# EAGLE board ESP32Cam-Programmer-Public (EAGLE 9.6.1)
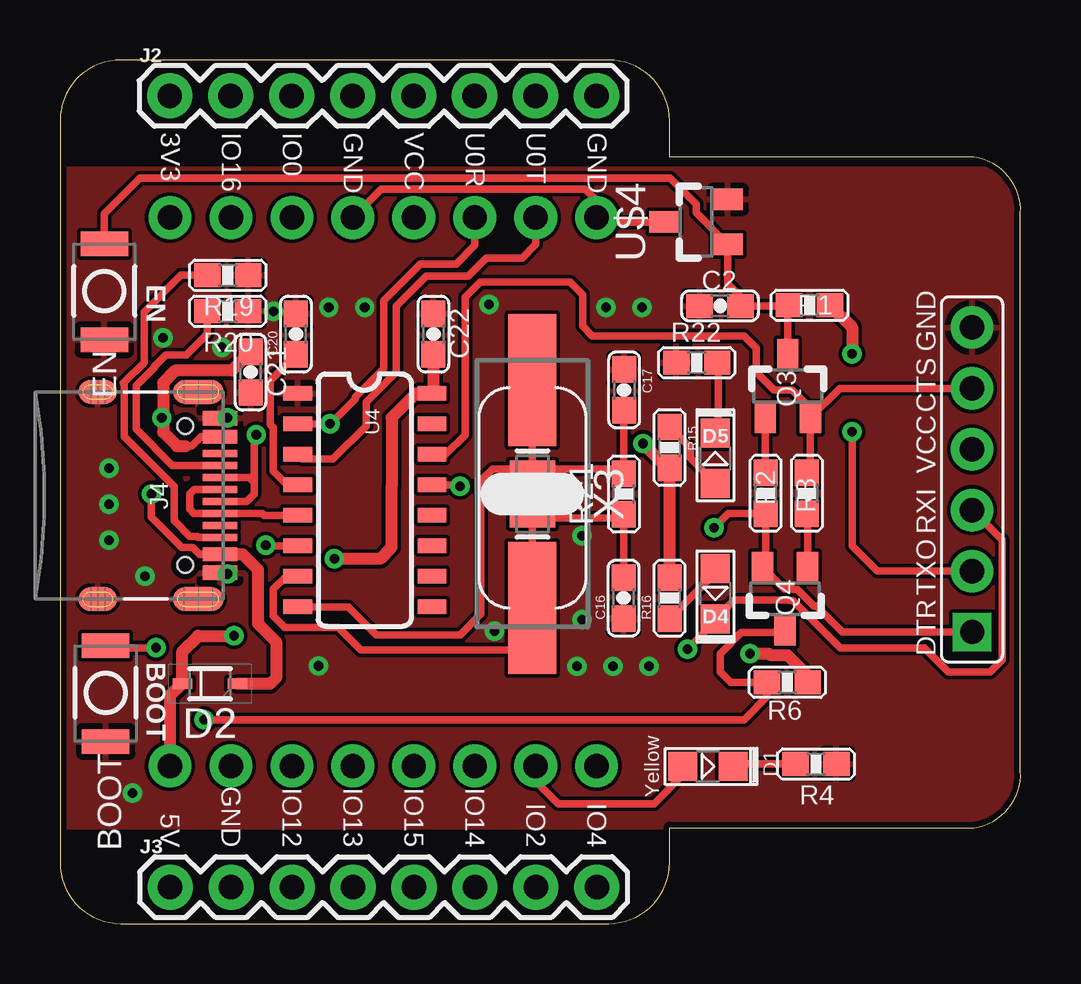
[diagram p0: board, top side]
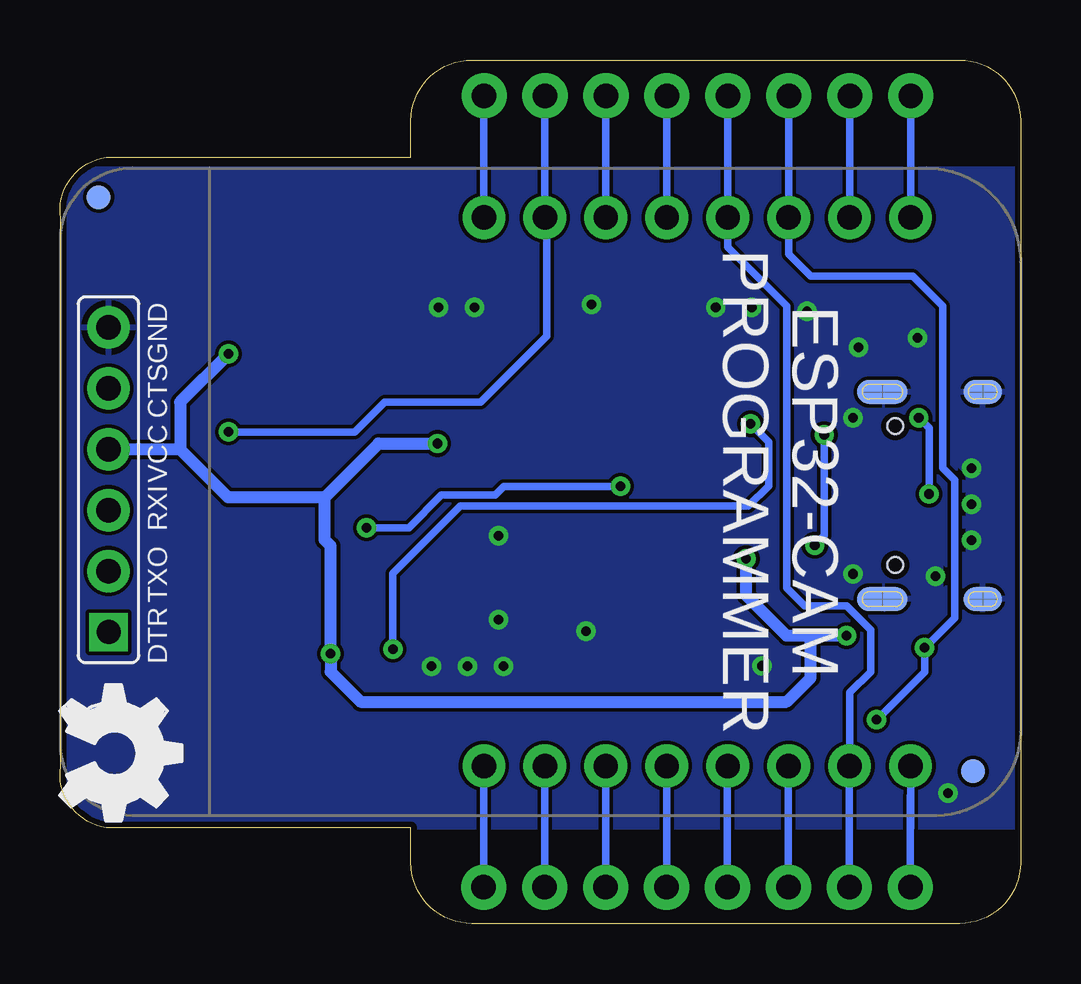
[diagram p1: board, bottom side, seen from below]

Size 40.02 x 36 mm. Coordinates in mm from the lower left corner, seen from the top.
Outline: 25.4,31.94 25.4,33.46 arc90 22.86,36 2.54,36 arc90 0,33.46 0,2.54 arc90 2.54,0 22.86,0 arc90 25.4,2.54 25.4,4 38.1,4 arc90 40,6.54 40,29.4 arc90 38.1,31.94 25.4,31.94
Copper layers (1*16): Top 0.035mm / dielectric 1.5mm / Bottom 0.035mm
Design rules "Gerai_Cerdas_DRU_v2_0_4mil": minimum track width 6mil, minimum drill 0.4mm, track to track 6mil, track to pad 6mil, pad to pad 6mil, via to via 6mil, smd to smd 0mil, copper to edge 10mil, drill to drill 10mil, minimum pad ring 12mil, minimum via ring 8mil, stop-mask expansion 2mil, vias tented up to drill 25mil, thermal gap 10mil

## Footprints (pad centres in the part's own frame; a part is rotated, then mirrored left to right if it is on the bottom)
157SW = smd 1.016 x 1.981: 1 0,0; 2 4,0
C0603 = smd 1.1 x 1: 1 -0.85,0; 2 0.85,0
LED0805 = smd 1.2 x 1.2: A 0,-1.05; C 0,1.05
SOD-323 = smd 0.82 x 0.42: A -1.15,0; C 1.15,0
CON-FTDI = drill 1.016 pad 1.778: CTS 3.81,0; GND 6.35,0; RXI -1.27,0; TX0 -3.81,0; VCC 1.27,0 | drill 1 square: DTR -6.35,0
1X08 = drill 1.016 pad 1.88: 1 0,0; 2 2.54,0; 3 5.08,0; 4 7.62,0; 5 10.16,0; 6 12.7,0; 7 15.24,0; 8 17.78,0
USB-C-16P = smd 0.3 x 1.45: A5 -1.25,0; A6 -0.25,0; A7 0.25,0; A8 1.25,0; B5 1.75,0; B6 0.75,0; B7 -0.75,0; B8 -1.75,0 | smd 0.6 x 1.45: GND -3.225,0; GND2 3.225,0 | smd 1 x 2.1: SHLD1 -4.32,-0.915; SHLD2 4.32,-0.915 | smd 1 x 2.1 bottom: SHLD3 -4.32,-0.915; SHLD4 4.32,-0.915 | smd 1 x 1.6: SHLD5 -4.32,-5.095; SHLD8 4.32,-5.095 | smd 1 x 1.6 bottom: SHLD6 -4.32,-5.095; SHLD7 4.32,-5.095 | smd 0.55 x 1.45: VBUS1 -2.45,0; VBUS2 2.45,0 | hole 0.65: -2.89,-1.445; 2.89,-1.445
FIDUCIAL-1X2 = smd 1 x 1: 1 0,0
SOT-23 = smd 0.889 x 1.27: 1 -0.94,-1.321; 2 0.94,-1.321; 3 0,1.321
R0603 = smd 1.1 x 1: 1 -0.85,0; 2 0.85,0
SO016 = smd 0.6 x 1.2: 1 -4.445,-2.8; 2 -3.175,-2.8; 3 -1.905,-2.8; 4 -0.635,-2.8; 5 0.635,-2.8; 6 1.905,-2.8; 7 3.175,-2.8; 8 4.445,-2.8; 9 4.445,2.8; 10 3.175,2.8; 11 1.905,2.8; 12 0.635,2.8; 13 -0.635,2.8; 14 -1.905,2.8; 15 -3.175,2.8; 16 -4.445,2.8
ESP32CAM = drill 1.016 pad 1.778: 3V3 11.43,-15.42; 5V -11.43,-15.42; GND 11.43,-7.8; GND1 11.43,2.36; GND2 -11.43,-12.88; IO0 11.43,-10.34; IO2 -11.43,-0.18; IO4 -11.43,2.36; IO12 -11.43,-10.34; IO13 -11.43,-7.8; IO14 -11.43,-2.72; IO15 -11.43,-5.26; IO16 11.43,-12.88; U0R 11.43,-2.72; U0T 11.43,-0.18; VCC 11.43,-5.26
SMD-CRYSTAL = smd 5.5 x 2: 1 -4.75,0; 2 4.75,0
CSTCE* = smd 0.7 x 1.905: 1 -1.041,0; 2 0,0; 3 1.041,0

## Placement (x,y rotation side)
BOOT  BUTTON  [157SW]  1.9,7.59 90 top
C2  10uF  [C0603]  27.5,25.75 0 top
C16  10pF  [C0603]  23.48,13.56 90 top
C17  10pF  [C0603]  23.51,22.25 270 top
C20  10nF  [C0603]  9.83,24.57 90 top
C21  100nF  [C0603]  7.94,22.99 270 top
C22  100nF  [C0603]  15.56,24.57 270 top
D1  Yellow  [LED0805]  27,6.55 270 top
D2  1N5819HW (SL)  [SOD-323]  6.25,10 180 top
D4  GREEN  [LED0805]  27.3,13.75 180 top
D5  Yellow  [LED0805]  27.3,19.4 0 top
EN  BUTTON  [157SW]  1.85,24.34 90 top
J1  CON-FTDI-DIP  [CON-FTDI]  38,18.5 90 top
J2  [1X08]  4.57,34.5 0 top
J3  [1X08]  4.59,1.52 0 top
J4  [USB-C-16P]  6.67,17.84 270 top
JP8  FIDUCIAL1X2  [FIDUCIAL-1X2]  38.42,30.28 180 bottom
JP9  FIDUCIAL1X2  [FIDUCIAL-1X2]  1.97,6.35 180 bottom
Q3  S8050  [SOT-23]  30.33,22.41 0 top
Q4  S8050  [SOT-23]  30.21,13.54 180 top
R1  10K  [R0603]  31.23,25.78 0 top
R2  10K  [R0603]  29.4,17.94 90 top
R3  10K  [R0603]  31.12,17.94 270 top
R4  1K  [R0603]  31.5,6.65 180 top
R6  10K  [R0603]  30.31,10.06 0 top
R15  330  [R0603]  25.4,19.85 270 top
R16  330  [R0603]  25.4,13.56 90 top
R19  5.1k  [R0603]  6.99,27.03 180 top
R20  5.1k  [R0603]  6.99,25.53 180 top
R21  [R0603]  23.5,17.91 90 top
R22  1K  [R0603]  26.54,23.38 0 top
U4  CH340G  [SO016]  12.7,17.65 270 top
U$1  ESP32CAM-FOOTPRINT  [ESP32CAM]  20,18 90 bottom
U$2  [OSHW_FILLX200_NOTEXT]  40.03,9.94 270 bottom
U$4  AO3400  [SOT-23]  26.5,29.25 90 top
U$13  FRAME  [A4-HOR]  -3.59,1.79 0 top  (outside the outline)
X3  [SMD-CRYSTAL]  19.68,17.91 270 top
X4  RESONATORSMD-CSTCEXX  [CSTCE*]  19.68,17.91 270 top

## Library data of the parts
BOOT EN = MySMD
C2 C16 C17 C20-C22 D1 D4 D5 J1 R1-R4 R6 R15 R16 R19-R22 U$1 U$4 U$13 X3 X4 = geraicerdas
D2 = geraicerdas; DATASHEET: https://datasheet.lcsc.com/szlcsc/1810232207_ON-Semiconductor-1N4148WS_C118873.pdf; MANUFACTURER_PART_NUMBER: 1N4148WS
J2 J3 = SparkFun-Connectors; PROD_ID: CONN-08438
J4 = SparkFun-Connectors; PROD_ID: CONN-14122
JP8 JP9 = SparkFun
Q3 Q4 = geraicerdas; DATASHEET: https://datasheet.lcsc.com/szlcsc/1809211225_Guangdong-Hottech-S8050_C181158.pdf; LCSC: C181158; MPN: S8050
U4 = SparkFun-DigitalIC; PROD_ID: IC-13498
U$2 = Logo

## Nets
CC3: J4.A5 R20.2
CC4: J4.B5 R19.2
D+2: J4.A6 J4.B6 U4.5
D-2: J4.A7 J4.B7 U4.6
DTR: J1.DTR Q4.2 R2.1 U4.13
EN: C2.2 EN.2 Q3.3 R1.1 U$4.1
GND: BOOT.1 C2.1 C16.1 C17.1 C20.2 C21.2 C22.1 EN.1 J1.GND J4.GND J4.GND2 R4.1 R19.1 R20.1 R22.1 U4.1 U$4.2 X4.2
IO0: BOOT.2 J2.3 Q4.3 R6.1 U$1.IO0
IO2: D1.A J3.7 U$1.IO2
IO4: J3.8 U$1.IO4
IO12: J3.3 U$1.IO12
IO13: J3.4 U$1.IO13
IO14: J3.6 U$1.IO14
IO15: J3.5 U$1.IO15
IO16: J2.2 U$1.IO16
N$2: D1.C R4.2
N$9: Q3.1 R2.2
N$10: Q4.1 R3.2
N$14: D4.A R16.1
N$15: D5.A R15.1
N$16: C17.2 R21.2 U4.8 X3.1 X4.1
N$17: C16.2 R21.1 U4.7 X3.2 X4.3
N$18: D5.C R22.2
NC_3V3: J2.1 U$1.3V3
NC_VCC: J2.5 U$1.VCC
RTS: J1.CTS Q3.2 R3.1 U4.14
SHLD: J4.SHLD1 J4.SHLD2 J4.SHLD3 J4.SHLD4 J4.SHLD5 J4.SHLD6 J4.SHLD7 J4.SHLD8
U0RX: D4.C J1.RXI J2.6 U4.2 U$1.U0R
U0TX: J1.TX0 J2.7 U4.3 U$1.U0T
USBVCC: C21.1 D2.A J4.VBUS1 J4.VBUS2
V1: C20.1 U4.4
VCC: C22.2 D2.C J1.VCC J3.1 R1.2 R6.2 R15.2 R16.2 U4.16 U$1.5V
VSS: J2.4 J2.8 J3.2 U$1.GND U$1.GND1 U$1.GND2 U$4.3

## Tracks (layer width: path | path; a pad name or v marks a point on that pad's centre or on a via)
CC3
  Top 0.305: R20.2 6.13,24.57 5.27,23.71 4.41,23.71 3.96,23.25 3.96,23.2 3.17,22.42 3.17,20.61 4.69,19.09 J4.A5
CC4
  Top 0.305: J4.B5 5.76,16.09 5.71,16.14 5.42,16.14 4.76,16.8 4.76,18.22 2.68,20.31 2.68,22.5 2.64,22.53 3.5,23.39 3.5,25.5 5.03,27.03 R19.2
D+2
  Top 0.305: U4.5 8.51,17.02 8.43,17.09 J4.B6 5.58,17.09 5.4,17.27 5.4,17.91 5.58,18.09 J4.A6
D-2  (via drill 0.4)
  Top 0.305: J4.B7 7.89,18.59 8.1,18.38 | 8.1,18.38 8.1,17.91 7.78,17.59 J4.A7 | 8.1,18.38 8.1,20.45 v8.18,20.38 | v8.57,15.78 8.6,15.75 U4.6
  Bottom 0.305: v8.18,20.38 8.18,16.17 v8.57,15.78
DTR  (via drill 0.4)
  Top 0.305: U4.13 16.61,18.29 v16.67,18.22 | v27.25,16.5 27.84,17.09 R2.1 29.4,15 Q4.2 30.18,13.96 30.55,13.96 30.58,13.92 30.72,13.92 31.4,13.25 31.5,13.25 32.6,12.15 J1.DTR
  Bottom 0.305: v16.67,18.22 21.53,18.22 21.89,17.86 24.14,17.86 25.5,16.5 v27.25,16.5
EN
  Top 0.152: C2.2 28.5,25.75
  Top 0.305: Q3.3 30.33,25.72 R1.1 30.36,25.75 28.5,25.75 28.5,26 27.82,26.68 U$4.1 26.5,29.63 26.5,30 25.42,31.08 3.33,31.08 1.85,29.6 EN.2
GND  (via drill 0.4)
  Top 0.305: J4.GND2 6.94,14.62 v6.99,14.57
  other vias: 21.75,12.67 21.75,16.16 12.7,25.69 22.75,25.69 8.89,25.53 4.29,24.42 18.1,12.19 21.55,10.72 6.99,21.08 3.02,5.44 24.25,25.69 10.77,10.74 23.05,10.72 24.55,10.72 11.2,25.69 17.87,25.81 6.75,24.02
  pour Bottom (isolate 0.254): 29.04,26.51 29.04,9.21 0.32,9.21 0.32,12.45 6.1,12.45 6.1,22.92 0.32,22.92 0.32,26.51
  pour Top (isolate 0.254, rank 2): 29.21,26.51 29.21,9.21 0.32,9.21 0.32,12.45 6.05,12.45 6.05,22.92 0.32,22.92 0.32,26.51
  pour Top: 0,4 0,31.5 40.25,31.5 40.25,4
  pour Bottom: 0,4 40.25,4 40.25,31.5 0,31.5
IO0  (via drill 0.4)
  Top 0.305: 30.24,12.25 Q4.3 30.12,12.13 28.38,12.13 27.5,11.25 27.5,10.5 27.94,10.06 R6.1 29.46,9.46 28.5,8.5 v6,8.5 | v4,11.5 1.99,11.5 BOOT.2
  Bottom 0.305: v6,8.5 4,10.5 v4,11.5 2.75,12.75 2.75,18.5 3.25,19 3.25,25.75 4.5,27 8.75,27 9.66,27.91 U$1.IO0 J2.3
IO2
  Top 0.305: U$1.IO2 19.82,5.93 20.75,5 24.75,5 25.95,6.2 D1.A
  Bottom 0.305: J3.7 U$1.IO2
IO4
  Bottom 0.305: J3.8 U$1.IO4
IO12
  Bottom 0.305: J3.3 U$1.IO12
IO13
  Bottom 0.305: J3.4 U$1.IO13
IO14
  Bottom 0.305: J3.6 U$1.IO14
IO15
  Bottom 0.305: J3.5 U$1.IO15
IO16
  Bottom 0.305: U$1.IO16 J2.2
N$2
  Top 0.305: D1.C 28.15,6.65 R4.2
N$9
  Top 0.305: R2.2 29.39,18.8 Q3.1
N$10
  Top 0.305: R3.2 31.15,17.05 Q4.1
N$14
  Top 0.305: D4.A 27.3,14.62 R16.1
N$15
  Top 0.305: R15.1 26.25,19.85 26.25,19.4 D5.A
N$16
  Top 0.305: X4.1 X3.1 | X4.1 23.45,18.95 23.5,18.91 | 23.5,18.91 23.5,21.39 C17.2 | U4.8 12,13.21 13.18,12.03 16.67,12.03 17.54,12.9 17.54,18.46 18.03,18.95 X4.1 | R21.2 23.5,18.91
N$17
  Top 0.305: 19.68,14.41 X4.3 19.6,16.95 19.05,16.95 19.1,16.91 23.5,16.91 | 19.68,14.41 X3.2 | 23.5,16.91 23.5,14.43 C16.2 | 19.68,14.41 20.16,13.94 20.16,11.4 12.54,11.4 11.59,12.35 9.37,12.35 8.89,12.83 8.89,13.94 9.43,14.48 U4.7 | R21.1 23.5,16.91
N$18
  Top 0.305: D5.C 27.43,20.57 27.43,23.33 R22.2
NC_3V3
  Bottom 0.305: U$1.3V3 4.58,34.48 5.08,34.48 5.08,34.5 J2.1
NC_VCC
  Bottom 0.305: U$1.VCC J2.5
RTS
  Top 0.305: Q3.2 31.27,18.93 R3.1 | Q3.2 31.27,21.48 30.5,22.25 29.75,22.25 29,23 29,24 28.5,24.5 22.18,24.5 21.78,24.9 21.78,26.22 21.25,26.75 17.5,26.75 16.88,26.12 16.88,20.38 16.06,19.56 U4.14 | Q3.2 32.49,22.31 J1.CTS
SHLD  (via drill 0.4)
  other vias: 2.04,17.48 2.04,15.98 2.04,18.98 3.54,14.48
  pour Top (isolate 0.305): 0.64,13.14 5.71,13.14 5.71,22.29 0.64,22.29
  pour Bottom (isolate 0.305): 0.64,13.08 5.65,13.08 5.65,22.29 0.64,22.29
U0RX  (via drill 0.4)
  Top 0.152: D4.C 27.3,12.59
  Top 0.305: U4.2 v11.25,20.83 12.29,21.87 12.29,21.94 13.49,23.14 13.49,25.98 14.75,27.24 14.75,27.25 15,27.5 16.5,27.5 17.28,28.28 U$1.U0R | 27.3,12.59 v26.15,11.44 | J1.RXI 39.25,15.98 39.25,11 38.75,10.5 37,10.5 36,11.5 32.5,11.5 30.53,13.47 30.39,13.47 30.36,13.5 28.1,13.5 D4.C 27.5,12.7
  Bottom 0.305: v26.15,11.44 26.15,14.6 23.35,17.4 11.35,17.4 10.5,18.25 10.5,20.08 v11.25,20.83 | U$1.U0R J2.6
U0TX  (via drill 0.4)
  Top 0.305: U4.3 10.09,19.37 11.37,19.37 12.75,20.75 12.75,21.75 14,23 14,25.75 15.25,27 17,27 17.75,27.75 19.25,27.75 19.82,28.32 U$1.U0T | J1.TX0 34.06,14.69 33,15.75 v33,20.5
  Bottom 0.305: v33,20.5 27.75,20.5 26.5,21.75 22.5,21.75 19.75,24.5 19.75,29.36 U$1.U0T J2.7
USBVCC  (via drill 0.4)
  Top 0.305: 5.24,19.9 5.49,19.9 5.88,20.29 J4.VBUS1 | J4.VBUS2 5.82,15.39 5.53,15.68 5.08,15.68 3.81,16.95 v3.81,17.91 | v4.24,21.08 4.3,21.08
  Top 0.508: 5.24,19.9 4.88,19.9 4.3,20.48 4.3,21.08 4.3,22.54 4.83,23.07 7.17,23.07 C21.1 | J4.VBUS2 7.61,15.39 8.25,14.75 8.25,12.5 9,11.75 9,10.25 8.75,10 D2.A
  Bottom 0.305: v3.81,17.91 3.81,20.65 v4.24,21.08
V1
  Top 0.305: U4.4 9.46,18.29 8.89,18.86 8.89,20.67 8.75,20.81 8.75,22.64 C20.1
VCC  (via drill 0.4)
  Top 0.152: R6.2 31.16,10.34
  Top 0.508: C22.2 15.56,22.16 U4.16 14.83,22.1 13.82,21.09 13.82,18.21 13.81,18.2 13.81,15.68 13.34,15.21 v11.43,15.21 | v24.29,20.01 25.3,19 R15.2 R16.2 | v28.75,11.25 29.53,11.25 29.6,11.18 30.32,11.18 31.16,10.34 | U$1.5V 4.58,9.48 D2.C 5.1,11.35 5.75,12 v7.25,12 | v33,23.75 33,24.86 R1.2
  Bottom 0.305: J3.1 4.59,4 | 4.59,4 4.59,5.33 4.58,5.33 | 4.59,4 4.58,4 U$1.5V
  Bottom 0.508: v7.25,12 8.75,12 | 8.75,12 9.75,12 11.43,13.68 v11.43,15.21 | v24.29,20.01 26.75,20.01 29,17.76 | 29,17.76 29,16 28.75,15.75 v28.75,11.25 28.75,10.5 27.5,9.25 9.75,9.25 8.75,10.25 8.75,12 | 29,17.76 33.01,17.76 35.02,19.77 | 35.02,19.77 J1.VCC | v33,23.75 35.02,21.73 35.02,19.77
VSS
  Top 0.305: U$4.3 22.54,29.25 | 22.54,29.25 U$1.GND1 | 22.54,29.25 22.54,29.96 21.88,30.62 13.39,30.62 U$1.GND
  Bottom 0.305: J2.4 U$1.GND 12.2,28.2 9.75,25.75 9.75,14 9,13.25 7.25,13.25 6.25,12.25 6.25,10.5 7.12,9.63 U$1.GND2 J3.2 | U$1.GND1 J2.8

## Text on the board
tPlace: 3V3 | IO16 | IO0 | GND | VCC | U0R | U0T | GND | EN | BOOT | 5V | GND | IO12 | IO13 | IO15 | IO14 | IO2 | IO4
bPlace: ESP32-CAM / PROGRAMMER